# Altium PCB PCB1.PcbDoc
Units mm, origin at the board's own origin, x right, y up, seen from the top; angles counter-clockwise.
Board outline 95 x 78.5 mm, 2 copper layers (Top Layer, Bottom Layer); 31 components, 31 nets, 137 pads, 42 vias.
Unrouted connection lines stored in the file: 3.
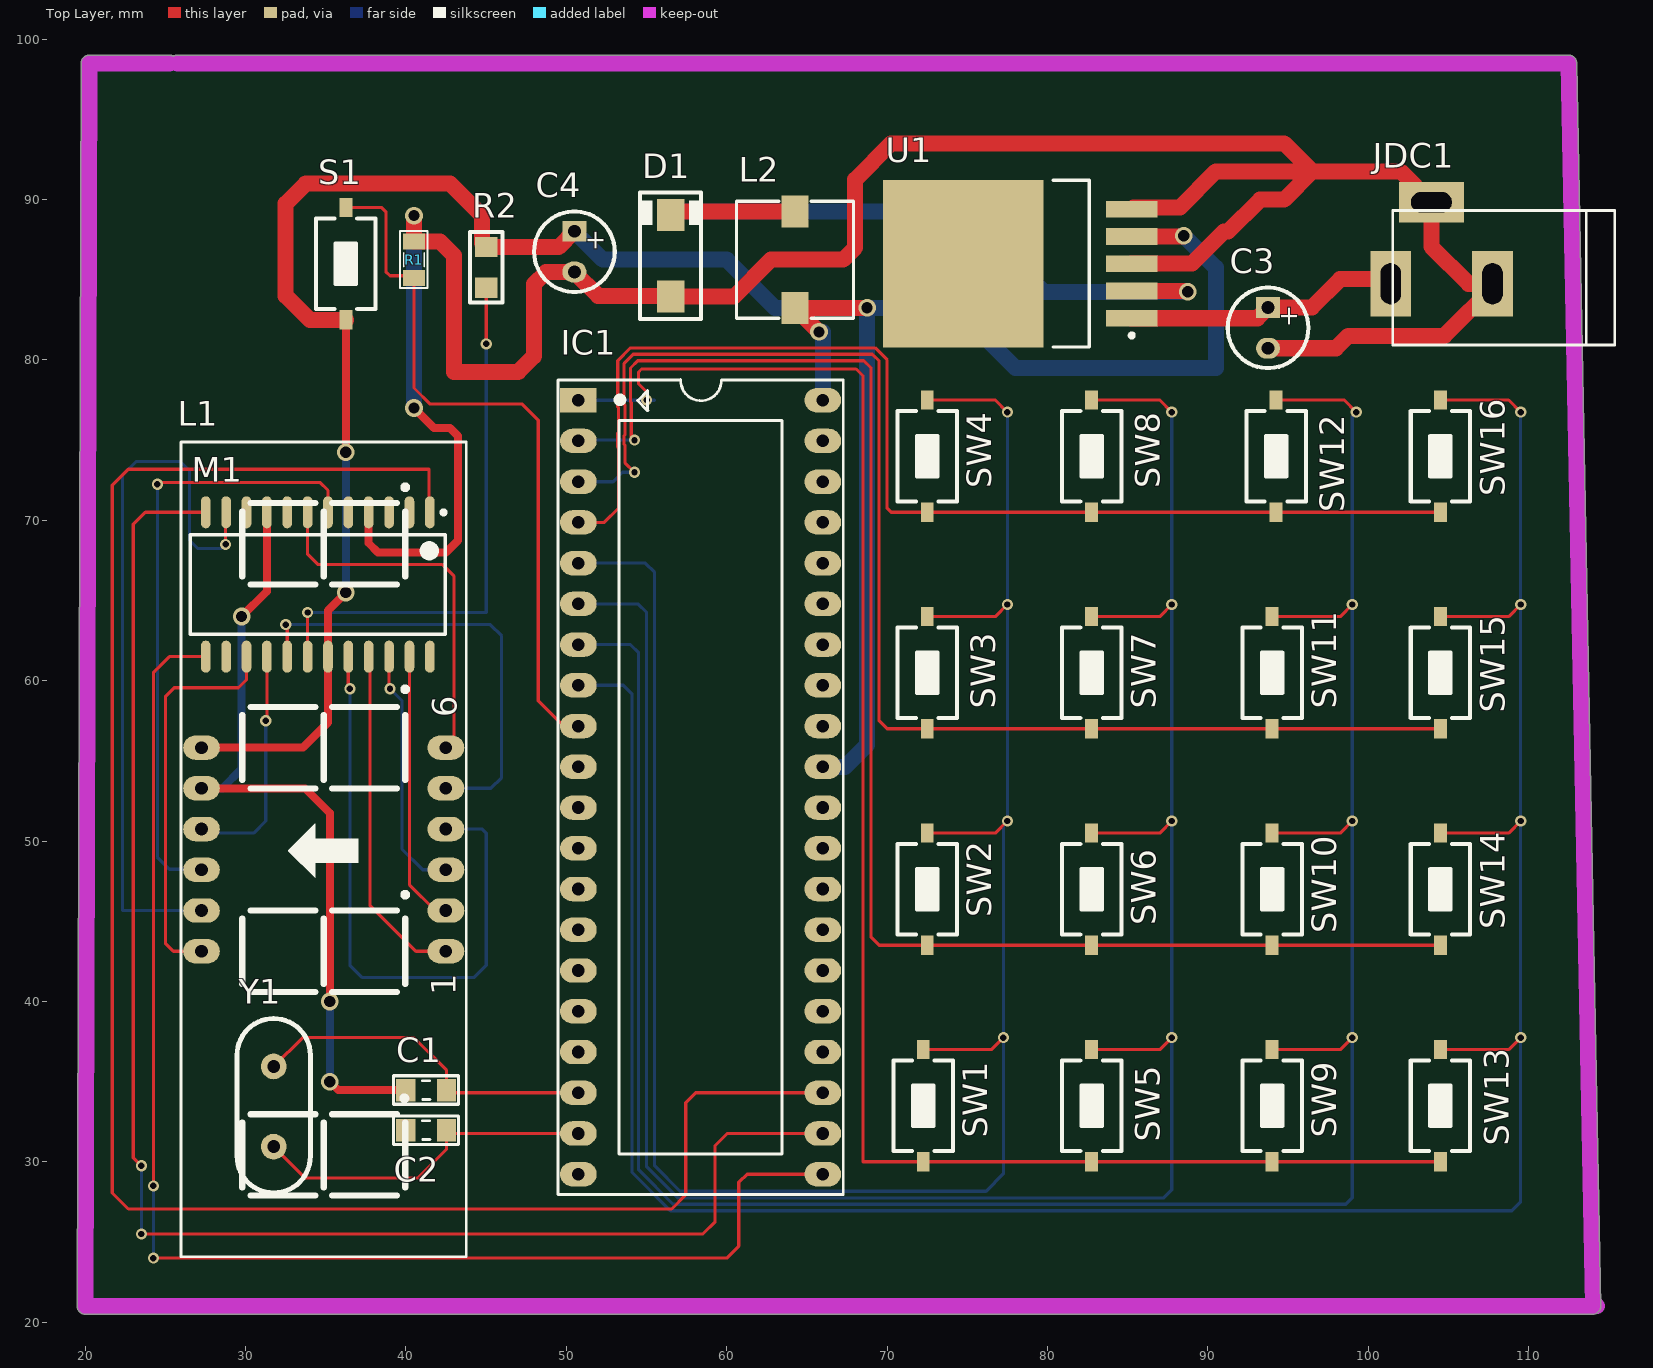
[diagram p0: Top Layer view]
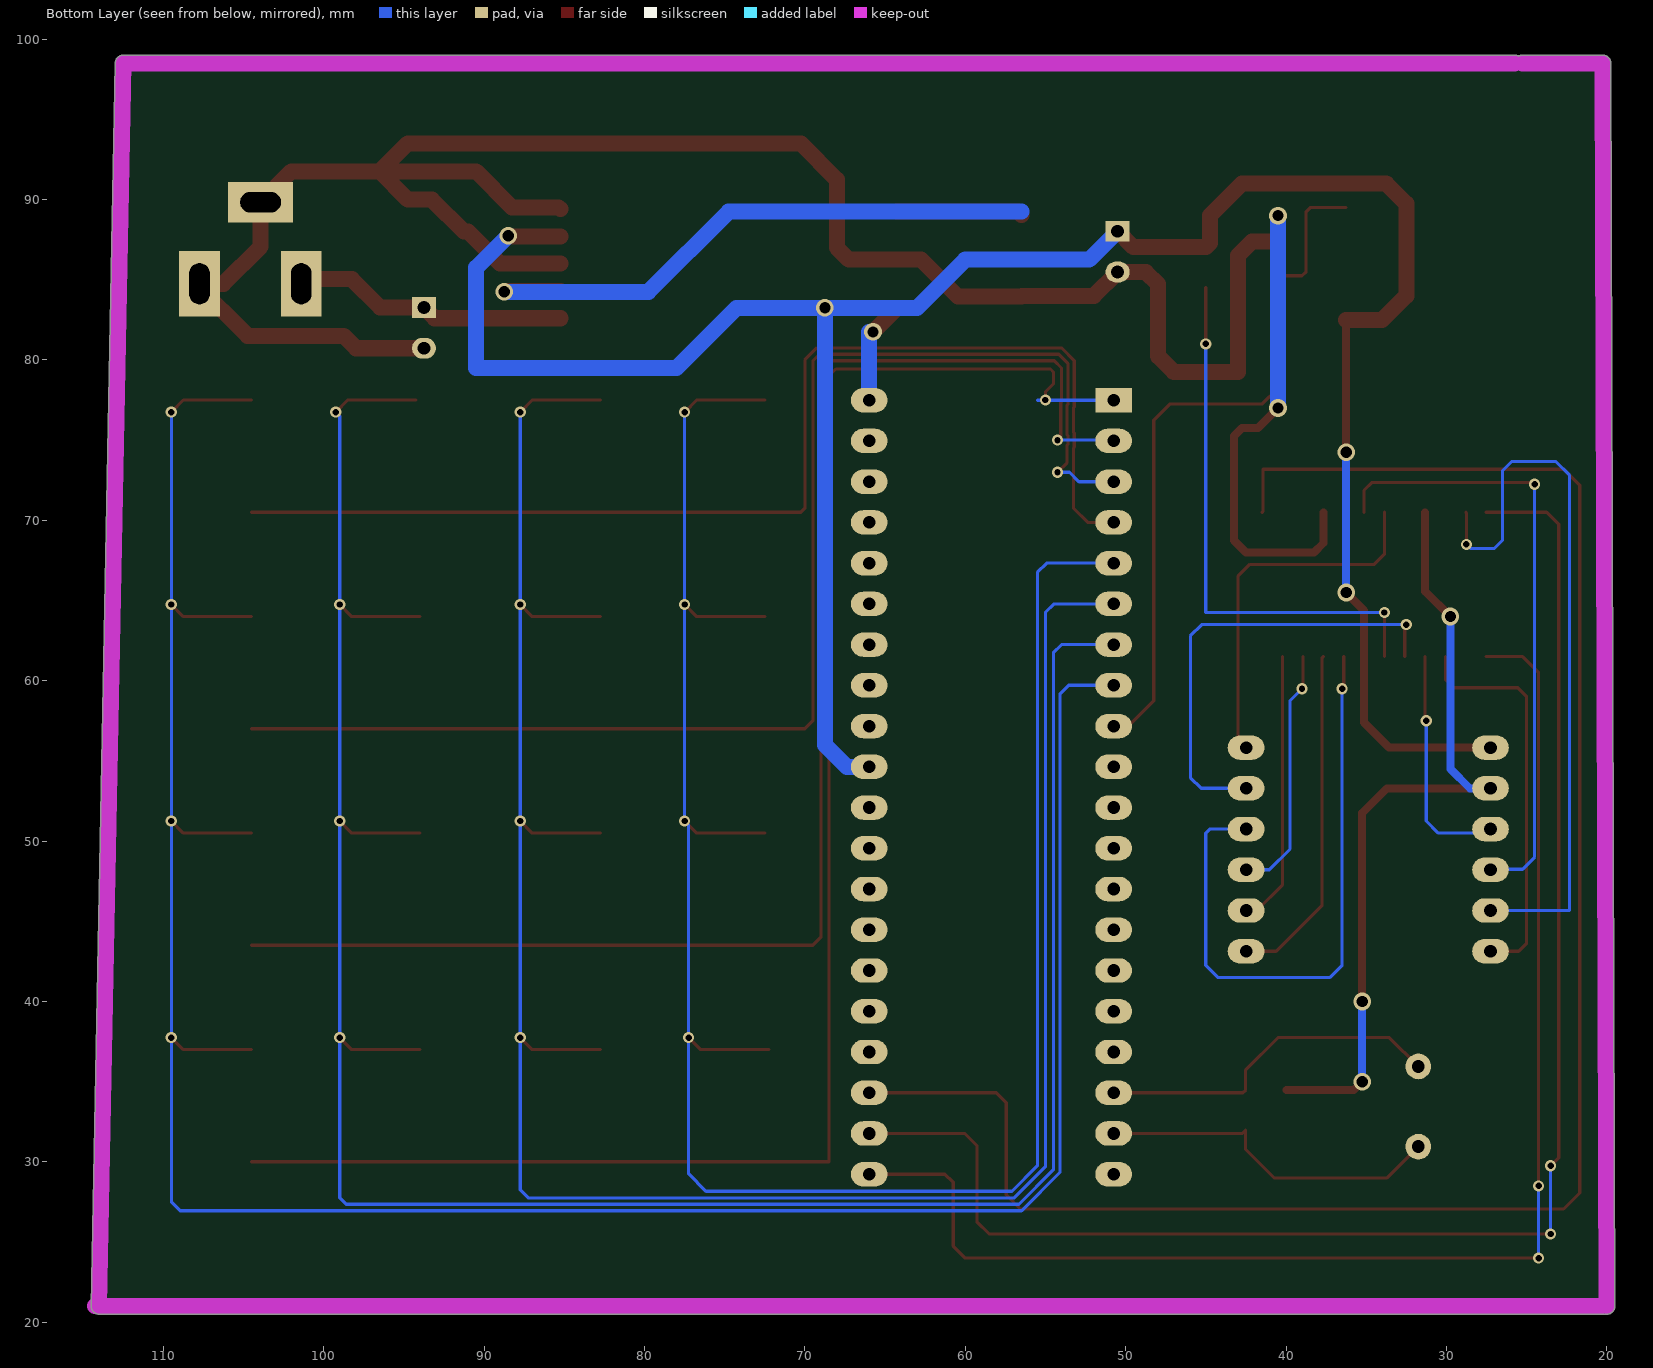
[diagram p1: Bottom Layer view, seen from below]

## Layer stack, top to bottom
Top Solder: solder mask 0.0102, Solder Resist, Dk 3.5
Top Layer: signal copper 0.0356
Dielectric 1: dielectric 0.32, FR-4, Dk 4.8
Bottom Layer: signal copper 0.0356
Bottom Solder: solder mask 0.0102, Solder Resist, Dk 3.5

## Board outline
19.5,21.002 19.75,98.502 cw(c20.25,98.5) 20.25,99 25.25,99 cw(c25.25,98.5) 25.5,98.933 cw(c25.75,98.5) 25.75,99 112.5,99 cw(c112.5,98.5) 113,98.509 114.5,21.01 cw(c114,21) 114.5,21 cw(c114,21) 114,20.5 20,20.5 cw(c20,21)

## Design rules (kind name [scope] priority, off if disabled: settings)
Clearance [All] p1: gap=0.2 ignorepadtopadclearanceinfootprint=FALSE
PolygonConnect [All] p1: connectstyle=Relief reliefconductorwidth=0.254 reliefentries=4 polygonreliefangle="90 Angle" airgapwidth=0.254
RoutingVias RoutingVias_power [InNetClass('Power_class')] p1: holewidth=0.7 width=1.1 viastyle="Through Hole" minholewidth=0.7 minwidth=1.1 maxholewidth=0.7 maxwidth=1.1
RoutingVias RoutingVias_signal [All] p2: holewidth=0.4 width=0.7 viastyle="Through Hole" minholewidth=0.4 minwidth=0.7 maxholewidth=0.4 maxwidth=0.7
SolderMaskExpansion [All] p1: expansion=0.102
Width Width_power [InNetClass('Power_class')] p1: maxlimit=2 minlimit=0.5 preferedwidth=1
Width Width_signal [All] p2: maxlimit=0.2 minlimit=0.2 preferedwidth=0.2
30 further rules are at their usual default settings.

## Classes and differential pairs
net class Power_class: +5 GND NetC3_1 NetD1_2
component class Designator: SW1 SW2 SW3 SW4 SW5 SW6 SW7 SW8 SW9 SW10 SW11 SW12 SW13 SW14 SW15 SW16
component class [05]-POWER: C3 C4 D1 JDC1 L2 U1
component class [03]-LED7SEG: L1 M1 R2
component class [02]-MCU: C1 C2 IC1 S1 Y1

## Components (designator, comment, footprint, x,y, rotation, side; value= is the part's Value field where it differs from the comment)
C1 "22pF" CAP_0805 41.25,34.5 r0 top value=33p
C2 "22pF" CAP_0805 41.25,32 r0 top value=33p
C3 "470uF" C5mm 93.75,82 r270 top
C4 "220uF" C5mm 50.5,86.75 r270 top
D1 "1N5822" SMA 56.5,86.5 r90 top value="Diode c?m 1N5408"
IC1 "AT89C52" DIP40/W0.6 50.75,77.49 r270 top
JDC1 "Jac DC" DC-IN 104.575,87.29 r180 top
L1 "Led 7 Seg 4 digit - Anode" 7SEGQ 42.49,43.13 r90 top
L2 "150mH" L-SMD-M-7.3x4.5 64.25,86.25 r0 top value="150 mH"
M1 "MAX7219ENG" SO24_L 34.5,66 r270 top
R1 "1k" RES-SMD-0805 40.5,86.25 r270 top value="R1/4W - 1K"
R2 "10k" RES_SMD_0805 45,85.77 r90 top value="R1/4W - 1K"
S1 "SW-SMD" SW-SMD 36.25,86 r90 top
SW1 "SW" SW-SMD 72.25,33.5 r90 top value="SW chip 2 pin"
SW2 "SW" SW-SMD 72.5,47 r90 top value="SW chip 2 pin"
SW3 "SW" SW-SMD 72.5,60.5 r90 top value="SW chip 2 pin"
SW4 "SW" SW-SMD 72.5,74 r90 top value="SW chip 2 pin"
SW5 "SW" SW-SMD 82.75,33.5 r90 top value="SW chip 2 pin"
SW6 "SW" SW-SMD 82.75,47 r90 top value="SW chip 2 pin"
SW7 "SW" SW-SMD 82.75,60.5 r90 top value="SW chip 2 pin"
SW8 "SW" SW-SMD 82.75,74 r90 top value="SW chip 2 pin"
SW9 "SW" SW-SMD 94,33.5 r90 top value="SW chip 2 pin"
SW10 "SW" SW-SMD 94,47 r90 top value="SW chip 2 pin"
SW11 "SW" SW-SMD 94,60.5 r90 top value="SW chip 2 pin"
SW12 "SW" SW-SMD 94.25,74 r90 top value="SW chip 2 pin"
SW13 "SW" SW-SMD 104.5,33.5 r90 top value="SW chip 2 pin"
SW14 "SW" SW-SMD 104.5,47 r90 top value="SW chip 2 pin"
SW15 "SW" SW-SMD 104.5,60.5 r90 top value="SW chip 2 pin"
SW16 "SW" SW-SMD 104.5,74 r90 top value="SW chip 2 pin"
U1 "LM2976" TO-263 79.25,86 r180 top
Y1 "20MHz" XTAL 31.75,33.5 r90 top

## Footprints (in the part's own frame and the unit in brackets; to place one, negate y for a bottom-side part, rotate by r counter-clockwise, add the part's x,y. Pads: shape width x height; smd on the part's side, far side on the other; paste and mask are expansions set on the pad)
7SEGQ [mil] "DIP 12 Leads; Body 48 x 20 mm; Pitch 0.5 mm"
  oval 60x90 hole 31: 1(0,0) 2(100,0) 3(200,0) 4(300,0) 5(400,0) 6(500,0) 7(500,600) 8(400,600) 9(300,600) 10(200,600) 11(100,600) 12(0,600)
  silkscreen extent -750,-50 1250,650, body extent -720,-80 1260,668, height 565
C5mm [mm]
  rect 1.3x1.5 hole 0.8: 1(-1.27,0)
  oval 1.3x1.5 hole 0.8: 2(1.27,0)
  silkscreen extent -2.51,-2.51 2.51,2.51, body extent -2.5,-2.5 2.49,2.5, height 11.01
CAP_0805 [mm]
  rect 1.2x1.4 smd: 1(-1.27,-0.025) 2(1.27,-0.025)
  silkscreen extent -2.03,-0.91 2.03,0.86, body extent -1.01,-0.66 1.01,0.61, height 0.61
DC-IN [mil] "Jac DC input"
  rect 100x160 hole 50 slot 100 at 90 deg: 1(125,100) 2(-125,100)
  rect 160x100 hole 50 slot 100 at 0 deg: 3(25,-100)
  silkscreen extent -425,-80 120,250, body extent -410,-105 134,269, height 434
DIP40/W0.6 [mil] "40 PIN, W 600mil, Pin to pin 100mil"
  rect 60x90 hole 31: 1(0,0)
  oval 60x90 hole 31: 2(100,0) 3(200,0) 4(300,0) 5(400,0) 6(500,0) 7(600,0) 8(700,0) 9(800,0) 10(900,0) 11(1000,0) 12(1100,0) 13(1200,0) 14(1300,0) 15(1400,0) 16(1500,0) 17(1600,0) 18(1700,0) 19(1800,0) 20(1900,0) 21(1900,600) 22(1800,600) 23(1700,600) 24(1600,600) 25(1500,600) 26(1400,600) 27(1300,600) 28(1200,600) 29(1100,600) 30(1000,600) 31(900,600) 32(800,600) 33(700,600) 34(600,600) 35(500,600) 36(400,600) 37(300,600) 38(200,600) 39(100,600) 40(0,600)
  silkscreen extent -50,-50 1950,650, body extent -82,-10 1982,600, height 224
L-SMD-M-7.3x4.5 [mm] "WE-PDA SMD Shielded Power Inductor, 7345"
  rect 1.7x2 smd: 1(0,3) 2(0,-3)
  silkscreen extent -3.65,-3.65 3.65,3.65, body extent -3.65,-3.65 3.65,3.65, height 4.05
RES-SMD-0805 [mil]
  rect 39.37x55 smd: 1(-45,0) 2(45,0)
  silkscreen extent -70,-34 70,33, body extent -39,-25 39,25, height 31
RES_SMD_0805 [mil]
  rect 50x55 smd: 1(-50,0) 2(50,0)
  silkscreen extent -87,-40 87,39, body extent -45,-27 45,27, height 30
SMA [mm]
  rect 2x1.7 smd: 1(-2.544,0) 2(2.544,0)
  silkscreen extent -3.94,-1.9 3.94,1.91, body extent -2.87,-1.4 2.87,1.4, height 2.29
SO24_L [mm] "SOIC, 24-Leads, Body 15.4x7.5mm, Pitch 1.27mm, IPC High Density"
  oval 2x0.6 smd: 1(-4.5,6.985) 2(-4.5,5.715) 3(-4.5,4.445) 4(-4.5,3.175) 5(-4.5,1.905) 6(-4.5,0.635) 7(-4.5,-0.635) 8(-4.5,-1.905) 9(-4.5,-3.175) 10(-4.5,-4.445) 11(-4.5,-5.715) 12(-4.5,-6.985) 13(4.5,-6.985) 14(4.5,-5.715) 15(4.5,-4.445) 16(4.5,-3.175) 17(4.5,-1.905) 18(4.5,-0.635) 19(4.5,0.635) 20(4.5,1.905) 21(4.5,3.175) 22(4.5,4.445) 23(4.5,5.715) 24(4.5,6.985)
  silkscreen extent -4.62,-7.95 3.1,7.96, body extent -3.8,-7.8 3.8,7.8, height 2.65
SW-SMD [mm] "Switch SMD type"
  rect 1.2x0.8 smd: 1(-3.5,0) 2(3.5,0)
  silkscreen extent -2.82,-1.85 2.82,1.85, body extent -3.05,-1.85 3.05,1.85, height 2.5
TO-263 [mm]
  rect 3.2x1.05 smd: 1(-6,3.4) 2(-6,1.7) 3(-6,0) 4(-6,-1.7) 5(-6,-3.4)
  rect 10x10.45 smd: 6(4.5,0)
  silkscreen extent -6.13,-5.2 -1.1,5.2, body extent -6.58,-5.2 7.57,5.2, height 4.65
XTAL [mm]
  round 1.6 hole 0.8: 1(-2.552,0.001) 2(2.448,0.001)
  silkscreen extent -5.44,-2.29 5.44,2.29, body extent -5.55,-2.32 5.62,2.35, height 3.63

## Part data
C1 C2: library part CapSMD, "Capacitor", LatestRevisionDate=17-Jul-2002, LatestRevisionNote="Re-released for DXP Platform.", PackageReference=RAD-0.3, Published=8-Jun-2000, Publisher="Altium Limited"
C3 C4: library part "Cap Pol", "Polarized Capacitor (Axial)", LatestRevisionDate=17-Jul-2002, LatestRevisionNote="Re-released for DXP Platform.", PackageReference=POLAR0.8, Published=8-Jun-2000, Publisher="Altium Limited"
D1: "Schottky Rectifiers"
IC1: "Atmel AT89C52, 8k Byte Flash Memory , 40 Pin"
JDC1: library part DCIN, "Jac DC input"
L1: library part LED7SEG-4DIGIT-A
L2: library part Inductor, "Inductor"
M1: "Serially Interfaced, 8-Digit LED Display Driver", Code_JEDEC=MS-001-AF, ComponentLink1Description="Manufacturer Link", ComponentLink1URL=http://www.maxim-ic.com/, ComponentLink2Description=Datasheet, ComponentLink2URL=http://pdfserv.maxim-ic.com/en/ds/MAX7219-MAX7221.pdf, DatasheetVersion=Jul-1997, LatestRevisionDate=29-May-2009, LatestRevisionNote="Component Body Added.", PackageDescription="DIP, 24-Pin, Row Spacing 7.62 mm, Pitch 2.54 mm", PackageReference=NG24A, PackageVersion=1997, Published=16-Jan-2001, Publisher="Altium Limited"
R1 R2: library part "Resistor - DIP", "Resistor - DIP"
S1: "Switch", LatestRevisionDate=17-Jul-2002, LatestRevisionNote="Re-released for DXP Platform.", PackageReference=SPST-2, Published=24-Mar-1999, Publisher="Altium Limited"
SW1 SW2 SW3 SW4 SW5 SW6 SW7 SW8 SW9 SW10 SW11 SW12 SW13 SW14 SW15 SW16: library part SW2, "Switch button 2 pin"
U1: library part LM2596, Max Input Voltage="12 V", Max Output Current="3 (6.0 peak) A", Max Output Voltage=mV, Temperature Range="-40 to +125 degC", Category=IC-Power, Min Input Voltage=mV, Min Output Voltage=mV, Mounting Technology="Surface Mount", Status=Unreleased, Supply Voltage=mV
Y1: library part XTAL, "Crystal Oscillator", LatestRevisionDate=17-Jul-2002, LatestRevisionNote="Re-released for DXP Platform.", PackageReference=R38, Published=8-Jun-2000, Publisher="Altium Limited"

## Via types
v1: diameter 0.7, hole 0.4, Top Layer to Bottom Layer, 31 vias
v2: diameter 1.1, hole 0.7, Top Layer to Bottom Layer, 11 vias

## Nets (pads, with @x,y where several pads share a name; then routed paths per layer and width w, separated by ;. In a path a pad name is that pad's centre, name@x,y a point inside that pad or via, vN(x,y) a via of type N, cw(c..) or ccw(c..) an arc to the next point about the centre after c; other vN are vias at no path point)
+5: C4.1 IC1.31 IC1.40 L1.7 L2.2 M1.19 R2.2 S1.1 U1.4 | length 164.1
  Top Layer w0.5: L1.7 33.58,55.83 35.135,57.385 M1.19 35.135,64.385 v2(36.25,65.5) ; v2(36.25,74.25) S1.1
  Top Layer w1: S1.1 34,82.5 32.5,84 32.5,89.75 33.75,91 42.75,91 44.75,89 44.75,87.29 R2.2 49.52,87.04 C4.1 ; v2(65.75,81.75) L2.2 v2(68.75,83.25) ; U1.4 88.45,87.7 v2(88.5,87.75)
  Bottom Layer w0.5: v2(36.25,65.5) v2(36.25,74.25)
  Bottom Layer w1: C4.1 52.27,86.25 60,86.25 63,83.25 v2(68.75,83.25) ; IC1.31 67.38,54.63 68.75,56 v2(68.75,83.25) ; IC1.40 v2@65.99,81.51 ; IC1.40@66,77.74 66.24,77.5 IC1.40@66.238,77.519 ; v2@66,81.5 v2@65.99,81.51 ; v2(88.5,87.75) 90.5,85.75 90.5,79.5 78,79.5 74.25,83.25 v2(68.75,83.25) ; v2@65.99,81.51 65.99,81.75 v2(65.75,81.75) v2@65.99,81.51
D0: M1.2
D1: L1.11 M1.11 | length 45.8
  Top Layer w0.2: v1(28.75,68.5) 28.75,70.465 M1.11
  Bottom Layer w0.2: L1.11 22.33,45.67 22.33,72.83 23.17,73.67 25.92,73.67 26.5,73.09 26.5,68.75 27,68.25 28.5,68.25 v1(28.75,68.5)
D2: L1.10 M1.6 | length 38.6
  Top Layer w0.2: v1(24.5,72.25) 24.615,72.365 34.635,72.365 35.135,71.865 M1.6
  Bottom Layer w0.2: v1(24.5,72.25) 24.5,49 25.25,48.25 27.21,48.25 L1.10
D3: L1.6 M1.7 | length 23.2
  Top Layer w0.2: M1.7 33.865,67.885 34.5,67.25 42.25,67.25 43,66.5 43,56.34 L1.6
GND: C1.1 C2.1 C3.2 C4.2 D1.1 JDC1.2 JDC1.3 L1.8 M1.4 M1.9 R1.1 U1.3 U1.5 | length 216.3
  Top Layer w0.5: L1.8 33.71,53.29 35.25,51.75 v2(35.25,40) ; v2(29.75,64) 31.325,65.575 M1.9 ; v2(35.25,35) 35.775,34.475 C1.1 ; M1.4 37.675,68.575 38.25,68 42.5,68 43.25,68.75 43.25,75.25 42.75,75.75 41.75,75.75 v2(40.5,77)
  Top Layer w1: v2(40.5,89) R1.1 42.107,87.393 43,86.5 43,79.25 47,79.25 47.98,80.23 47.98,84.73 48.73,85.48 C4.2 51.98,84 56.456,84 D1.1 60.456,83.956 62.75,86.25 67.25,86.25 68,87 68,91.25 70.25,93.5 94.75,93.5 96.5,91.75 ; U1.3 89,86 91,88 91.25,88 93.25,90 94.75,90 96.5,91.75 ; U1.5 85.35,89.5 88.25,89.5 90.5,91.75 96.5,91.75 ; C3.2 97.98,80.73 98.75,81.5 104.75,81.5 108,84.75 JDC1.2 106.25,84.75 103.94,87.06 JDC1.3 102.02,91.75 96.5,91.75
  Bottom Layer w0.5: L1.8 28.54,53.29 29.75,54.5 v2(29.75,64) ; v2@35.25,34.75 v2(35.25,35) v2(35.25,40)
  Bottom Layer w1: v2(40.5,77) v2(40.5,89)
NetC1_2: C1.2 IC1.18 Y1.2 | length 21.9
  Top Layer w0.2: Y1.2 33.551,37.75 40.5,37.75 42.52,35.73 C1.2 42.685,34.31 IC1.18
NetC2_2: C2.2 IC1.19 Y1.1 | length 21.8
  Top Layer w0.2: Y1.1 33.697,29 40.75,29 42.52,30.77 C2.2 42.725,31.77 IC1.19
NetC3_1: C3.1 JDC1.1 U1.1 | length 17.3
  Top Layer w1: U1.1 93.08,82.6 C3.1 96.48,83.27 98.25,85.04 101.11,85.04 JDC1.1
NetD1_2: D1.2 L2.1 U1.2 | length 45.7
  Top Layer w1: D1.2 56.706,89.25 L2.1 ; U1.2 88.7,84.3 v2(88.75,84.25)
  Bottom Layer w1: 56.5,89.25 74.75,89.25 79.75,84.25 v2(88.75,84.25)
NetIC1_1: IC1.1 SW1.1 SW5.1 SW9.1 SW13.1 | length 106.4
  Top Layer w0.2: v1(55,77.5) 55,78 54.5,78.5 54.5,79.25 54.684,79.434 68.066,79.434 68.5,79 68.5,30 SW1.1 SW5.1 SW9.1 SW13.1
  Bottom Layer w0.2: IC1.1 55.49,77.49 55.48,77.5 v1(55,77.5)
NetIC1_2: IC1.2 SW2.1 SW6.1 SW10.1 SW14.1 | length 94.7
  Top Layer w0.2: v1(54.25,75) 54.05,75.2 54.05,77.346 54,77.396 54,79.5 54.45,79.95 68.55,79.95 69,79.5 69,44 69.5,43.5 SW2.1 SW6.1 SW10.1 SW14.1
  Bottom Layer w0.2: IC1.2 50.8,75 v1(54.25,75)
NetIC1_3: IC1.3 SW3.1 SW7.1 SW11.1 SW15.1 | length 84.8
  Top Layer w0.2: v1(54.25,73) 53.65,73.6 53.65,74.681 53.6,74.731 53.6,75.269 53.65,75.319 53.65,77.181 53.6,77.231 53.6,79.784 54.166,80.35 69.084,80.35 69.5,79.934 69.5,57.5 70,57 SW3.1 SW7.1 SW11.1 SW15.1
  Bottom Layer w0.2: IC1.3 52.91,72.41 53.5,73 v1(54.25,73)
NetIC1_4: IC1.4 SW4.1 SW8.1 SW12.1 SW16.1 | length 73.2
  Top Layer w0.2: IC1.4@51,69.87 52.37,69.87 53.25,70.75 53.25,74.515 53.2,74.565 53.2,75.435 53.25,75.485 53.25,77.015 53.2,77.065 53.2,79.95 54,80.75 69.25,80.75 70,80 70,70.75 70.25,70.5 SW4.1 SW8.1 SW12.1 SW16.1
NetIC1_5: IC1.5 SW1.2 SW2.2 SW3.2 SW4.2 | length 133.7
  Top Layer w0.2: SW1.2 76.5,37 v1(77.25,37.75) ; SW2.2 76.75,50.5 v1(77.5,51.25) ; SW3.2 76.75,64 v1(77.5,64.75) ; SW4.2 76.75,77.5 v1(77.5,76.75)
  Bottom Layer w0.2: IC1.5 54.92,67.33 55.5,66.75 55.5,29.75 57.082,28.168 76.168,28.168 77.25,29.25 v1(77.25,37.75) 77.25,51 v1(77.5,51.25) v1(77.5,64.75) v1(77.5,76.75)
NetIC1_6: IC1.6 SW5.2 SW6.2 SW7.2 SW8.2 | length 142.5
  Top Layer w0.2: SW5.2 87,37 v1(87.75,37.75) ; SW6.2 87,50.5 v1(87.75,51.25) ; SW7.2 87,64 v1(87.75,64.75) ; SW8.2 87,77.5 v1(87.75,76.75)
  Bottom Layer w0.2: IC1.6 54.46,64.79 55,64.25 55,29.684 56.934,27.75 87.25,27.75 87.75,28.25 v1(87.75,37.75) v1(87.75,51.25) v1(87.75,64.75) v1(87.75,76.75)
NetIC1_7: IC1.7 SW9.2 SW10.2 SW11.2 SW12.2 | length 152.1
  Top Layer w0.2: SW9.2 98.25,37 v1(99,37.75) ; SW10.2 98.25,50.5 v1(99,51.25) ; SW11.2 98.25,64 v1(99,64.75) ; SW12.2 98.5,77.5 v1(99.25,76.75)
  Bottom Layer w0.2: IC1.7 54,62.25 54.5,61.75 54.5,29.5 56.65,27.35 98.6,27.35 99,27.75 v1(99,37.75) v1(99,51.25) v1(99,64.75) 99,76.5 v1(99.25,76.75)
NetIC1_8: IC1.8 SW13.2 SW14.2 SW15.2 SW16.2 | length 160.5
  Top Layer w0.2: SW13.2 108.75,37 v1(109.5,37.75) ; SW14.2 108.75,50.5 v1(109.5,51.25) ; SW15.2 108.75,64 v1(109.5,64.75) ; SW16.2 108.75,77.5 v1(109.5,76.75)
  Bottom Layer w0.2: IC1.8 53.54,59.71 54.1,59.15 54.1,29.334 56.484,26.95 108.95,26.95 109.5,27.5 v1(109.5,37.75) v1(109.5,51.25) v1(109.5,64.75) v1(109.5,76.75)
NetIC1_9: IC1.9 R1.2 S1.2 | length 44.4
  Top Layer w0.2: S1.2 38.5,89.5 38.75,89.25 38.75,85.5 39,85.25 40.357,85.25 R1.2 40.5,78.25 41.5,77.25 47.25,77.25 48.25,76.25 48.25,58.75 49.83,57.17 IC1.9
NetIC1_21: IC1.21 M1.13 | length 86.4
  Top Layer w0.2: v1(24.25,24) 60,24 60.75,24.75 60.75,28.75 60.79,28.75 61.27,29.23 IC1.21 ; v1(24.25,28.5) 24.25,60.5 25.25,61.5 M1.13
  Bottom Layer w0.2: v1(24.25,24) v1(24.25,28.5)
NetIC1_22: IC1.22 M1.12 | length 97.2
  Top Layer w0.2: v1(23.5,25.5) 58.5,25.5 59.27,26.27 59.27,31.02 60.02,31.77 IC1.22 ; v1(23.5,29.75) 23,30.25 23,69.75 23.75,70.5 M1.12
  Bottom Layer w0.2: v1(23.5,25.5) v1(23.5,29.75)
NetIC1_23: IC1.23 M1.1 | length 118.1
  Top Layer w0.2: M1.1 41.44,70.545 41.44,73.19 22.69,73.19 21.69,72.19 21.69,28.06 22.69,27.06 56.56,27.06 57.44,27.94 57.44,33.69 58.06,34.31 IC1.23
NetL1_1: L1.1 M1.21 | length 21.5
  Top Layer w0.2: M1.21 37.75,61.425 37.75,46 40.62,43.13 L1.1
NetL1_2: L1.2 M1.23 | length 17.2
  Top Layer w0.2: M1.23 40.215,47.285 41.83,45.67 L1.2
NetL1_3: L1.3 M1.22 | length 15.6
  Top Layer w0.2: M1.22 38.945,59.555 v1(39,59.5)
  Bottom Layer w0.2: v1(39,59.5) 39.75,58.75 39.75,49.5 41.04,48.21 L1.3
NetL1_4: L1.4 M1.20 | length 39.3
  Top Layer w0.2: M1.20 36.405,59.595 v1(36.5,59.5)
  Bottom Layer w0.2: v1(36.5,59.5) 36.5,42.25 37.25,41.5 44.25,41.5 45,42.25 45,50.5 44.75,50.75 L1.4
NetL1_5: L1.5 M1.17 | length 28.4
  Top Layer w0.2: v1(32.5,63.5) 32.595,63.405 M1.17
  Bottom Layer w0.2: v1(32.5,63.5) 45.25,63.5 45.96,62.79 45.96,53.96 45.29,53.29 L1.5
NetL1_9: L1.9 M1.16 | length 14.7
  Top Layer w0.2: v1(31.25,57.5) 31.325,57.575 M1.16
  Bottom Layer w0.2: L1.9 27.5,50.5 30.5,50.5 31.25,51.25 v1(31.25,57.5)
NetL1_12: L1.12 M1.15 | length 24.8
  Top Layer w0.2: L1.12 25.5,43.13 25,43.63 25,59 25.555,59.555 29.555,59.555 30.055,60.055 M1.15
NetL1_13: M1.14
NetM1_18: M1.18 R2.1 | length 34.1
  Top Layer w0.2: M1.18 v1(33.865,64.25) ; v1(45,81) R2.1
  Bottom Layer w0.2: v1(33.865,64.25) 45,64.25 v1(45,81)
pads on no net: IC1.10 IC1.11 IC1.12 IC1.13 IC1.14 IC1.15 IC1.16 IC1.17 IC1.20 IC1.24 IC1.25 IC1.26 IC1.27 IC1.28 IC1.29 IC1.30 IC1.32 IC1.33 IC1.34 IC1.35 IC1.36 IC1.37 IC1.38 IC1.39 M1.3 M1.5 M1.8 M1.10 M1.24 U1.6

## Keep-outs
Keep-Out Layer:
  lines w1: 20,21 20.25,98.5 25.25,98.5 ; 20.25,21 114.25,21 ; 25.75,98.5 112.5,98.5 114,21

## Text inside footprints (layer, text, board x,y; h text height)
C3: Top Overlay "+" at 94.588,83.397 h1.2 r270
C4: Top Overlay "+" at 51.338,88.147 h1.2 r270
L1: Top Overlay "6" at 43.15,57.735 h1.52 r90; Top Overlay "1" at 43.1,40.387 h1.52 r90